# Altium PCB AGRSHUB_PCB.PcbDoc (part 2 of 2)
Units mil, origin at the board's own origin, x right, y up, seen from the top; angles counter-clockwise.
Board outline 4405 x 3410 mil, 2 copper layers (Top Layer, Bottom Layer); 159 components, 148 nets, 602 pads, 103 vias.
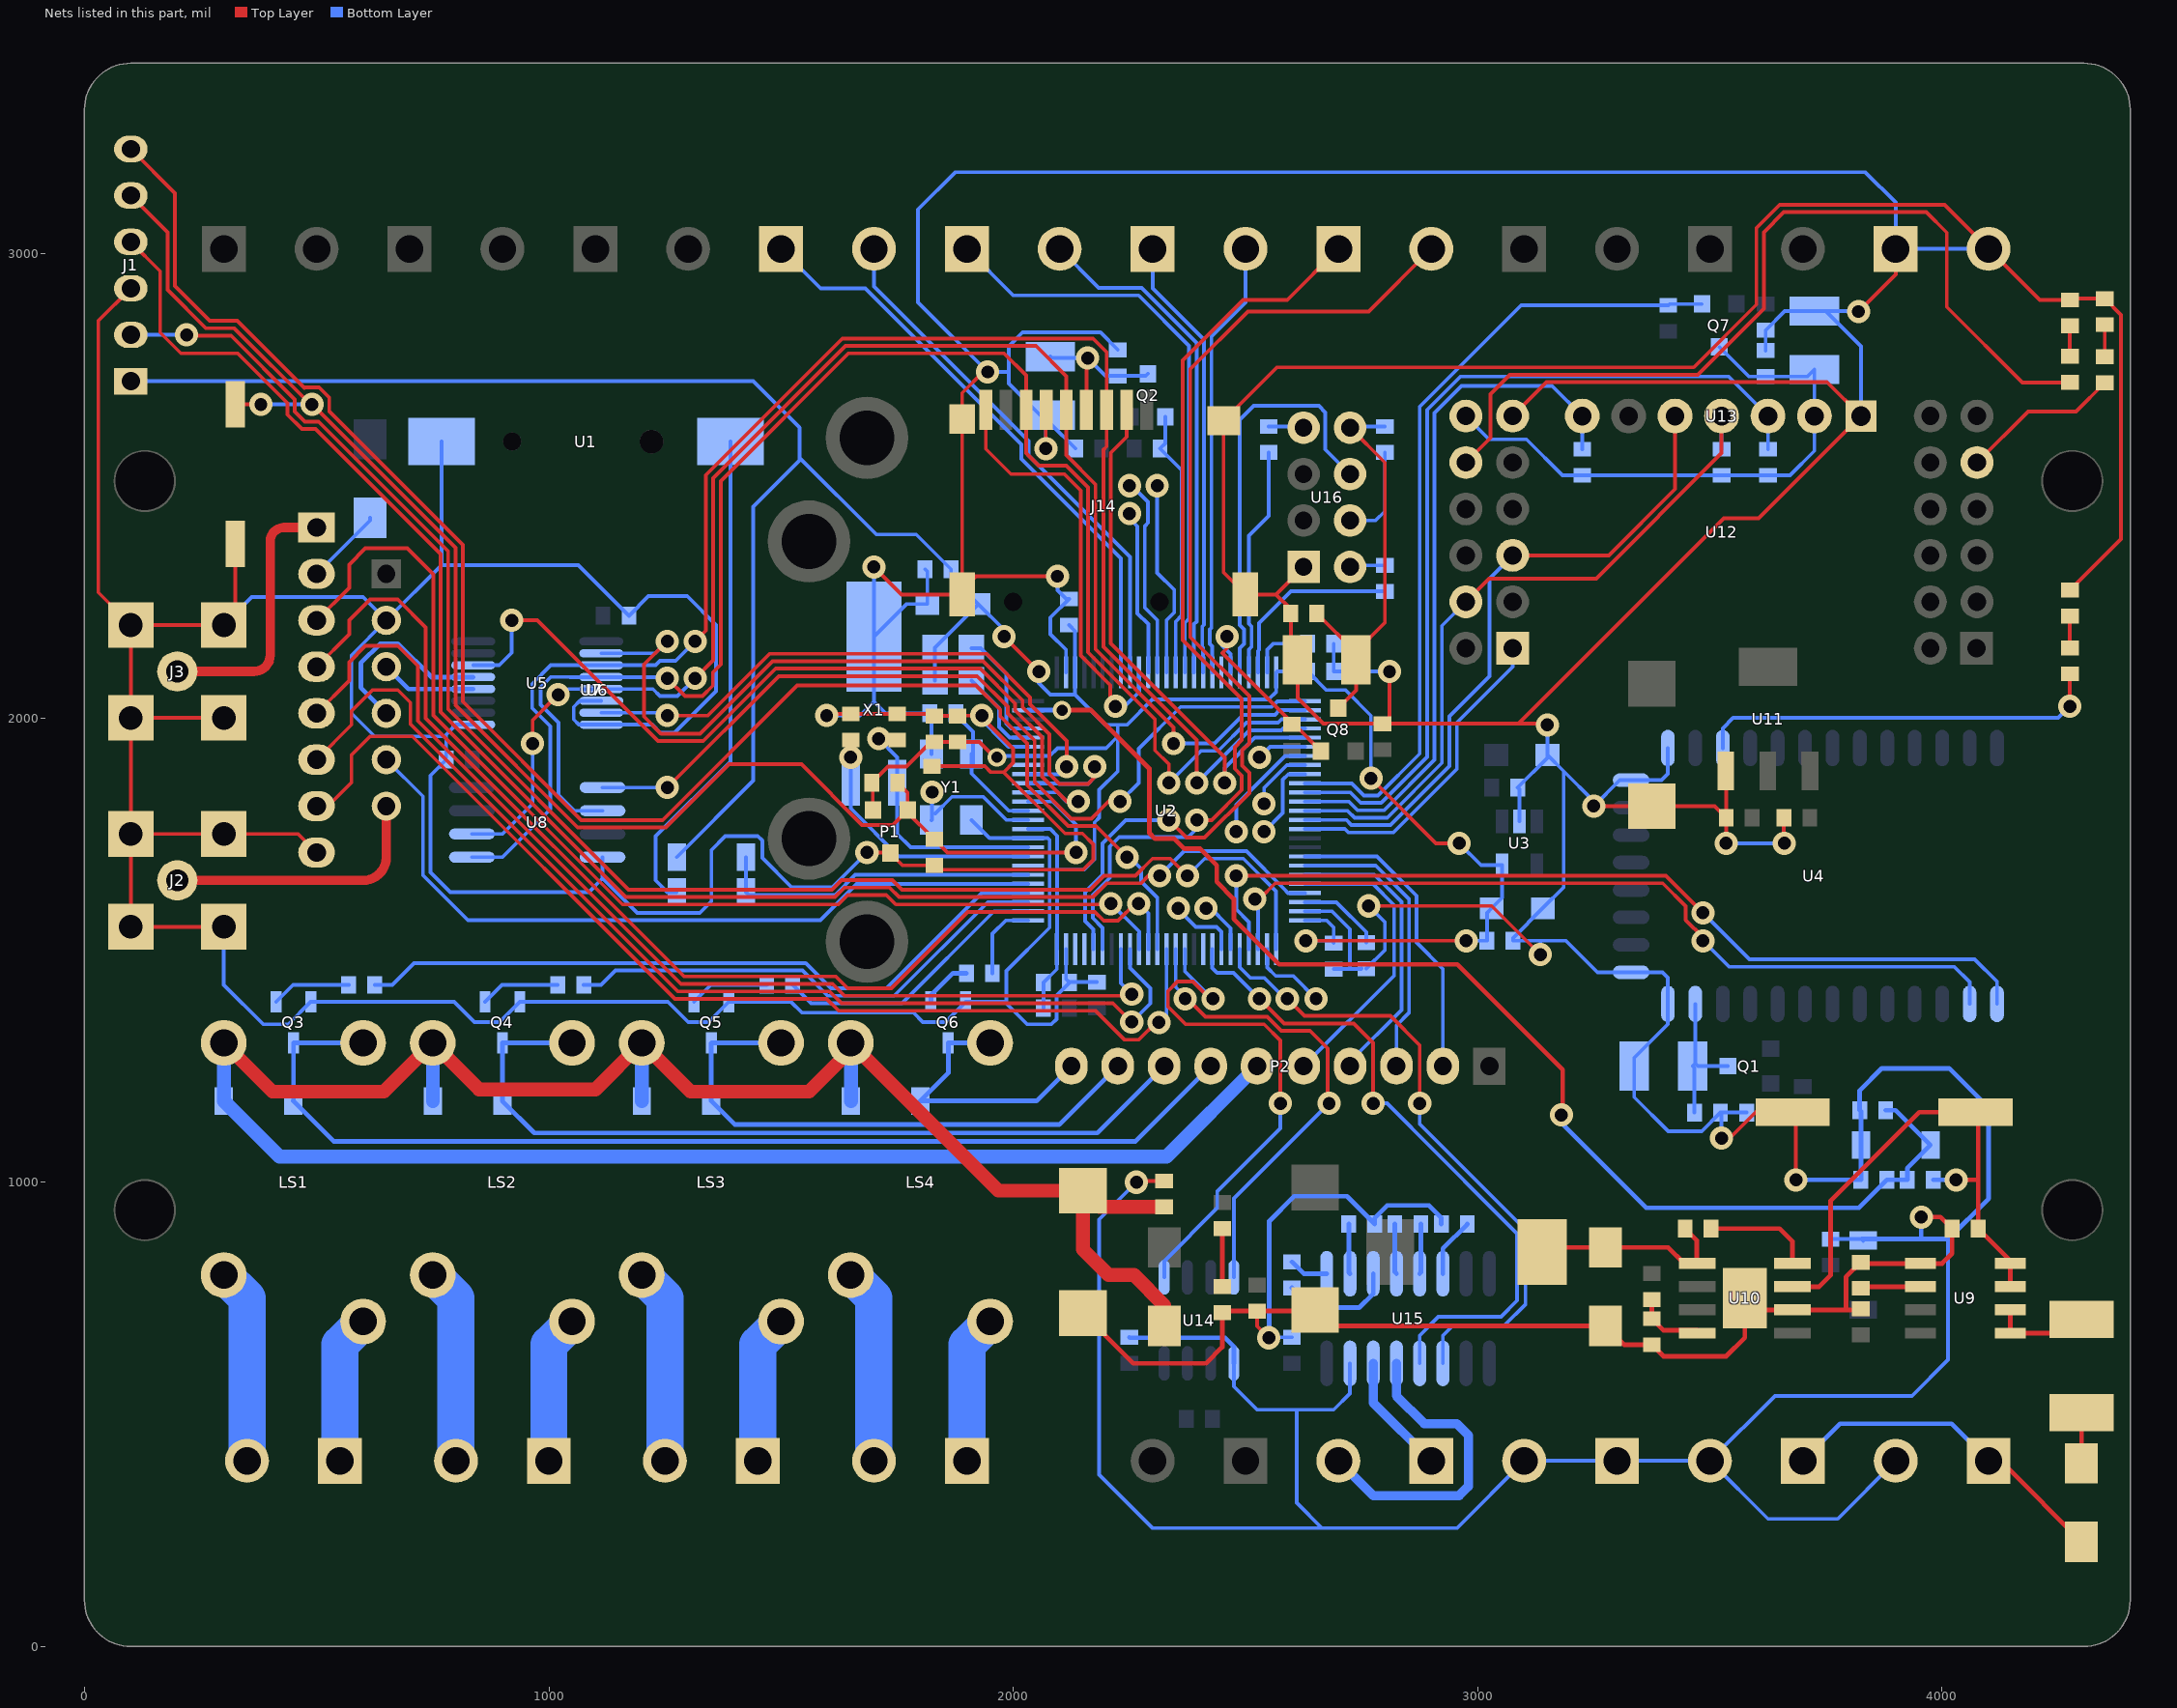
[diagram p2: the nets of this part, all layers, seen from the top]

## Via types
v1: diameter 50, hole 28, Top Layer to Bottom Layer, 101 vias
v2: diameter 40, hole 24, Top Layer to Bottom Layer, 2 vias

## Nets (pads, with @x,y where several pads share a name; then routed paths per layer and width w, separated by ;. In a path a pad name is that pad's centre, name@x,y a point inside that pad or via, vN(x,y) a via of type N, cw(c..) or ccw(c..) an arc to the next point about the centre after c; other vN are vias at no path point) (continued)
GND: C1.1 C2.1 C3.1 C4.1 C5.1 C6.1 C7.1 C8.1 C9.2 C10.2 C11.2 C12.2 C13.1 C14.1 C15.2 C16.2 C17.2 C18.1 C19.1 C20.1 C21.1 C22.1 C23.1 C24.1 C25.1 C26.1 C27.1 C28.1 C29.1 C30.1 C31.1 C32.2 C33.2 C35.1 C36.2 C37.2 C38.1 C39.2 C40.1 C41.1 C42.1 C43.1 C44.1 C45.1 C46.1 C47.2 C49.2 C51.1 C52.1 C53.1 D4.1 D5.1 D8.1 J1.3 J2.2 J2.3 J2.4 J2.5 J3.2 J3.3 J3.4 J3.5 J13.1 J13.2 J14.6 J14.10 J14.11 J14.12 J14.13 J15.2 J16.2 J23.1 J23.2 LED1.2 LED2.2 LED3.2 LED4.2 P1.3 Q3.2 Q4.2 Q5.2 Q6.2 R3.2 R8.1 R11.1 SW1.1 U1.2 U2.10 U2.20 U2.27 U2.74 U2.99 U3.2 U4.13 U4.14 U4.21 U4.22 U5.6 U5.8 U5.9 U6.2 U7.8 U8.4 U9.5 U10.6 U10.9 U11.1 U12.23 U13.1 U14.5 U15.15 U16.1 X1.3 Y1.2 Y1.4 | length 36990.1
  Top Layer w8: J1.3@100,2925 30,2855 30,2270 J3.5@100,2200 ; J2.3@300,1550 J2.2@100,1550 J2.5@100,1750 ; J3.3@300,2000 J3.2@100,2000 ; SW1.1@325,2375 325,2225 J3.4@300,2200 J3.5@100,2200 ; U7.8@500,1710 460,1750 J2.4@300,1750 J2.5@100,1750 ; v1(1598.12,2005) 1601.56,2008.44 C10.2@1650,2008.44 C12.2@1750,2008.44 1825.68,2008.44 C1.1@1830,2004.12 C6.1@1880,2004.12 1880.88,2005 v1(1932.32,2005) 1932.32,2001.32 2000,1933.65 2000,1903.58 1979.42,1883 ; v1(1685,1710) 1733.74,1710 P1.3@1735,1708.74 1761.3,1682.44 C8.1@1830,1682.44 1839.44,1673 2150.33,1673 2172,1694.67 2172,1728 2149,1751 2111.42,1751 1979.42,1883 ; v1(1700,2325) 1759.25,2265.75 J14.11@1880,2265.75 ; C13.1@1825,1896 1938.75,1896 1951.75,1883 1979.42,1883 ; J14.11@1889.77,2265.75 J14.11@1880,2265.75 ; v1(1945,2745) 1935,2745 1889.77,2699.77 J14.10@1889.77,2643.7 J14.11@1889.77,2275.52 ; v1(2070,2580) 2070,2662.52 J14.6@2070.87,2663.38 ; v1(2095,2305) 1919.25,2305 J14.11@1889.77,2275.52 ; v1(2265,1000) 2267.56,1002.56 C38.1@2325,1002.56 ; C35.1@2525,722.44 2525,690 v1(2550,665) ; U16.1@2625,2325 2565.75,2265.75 ; v1(2765,1595) 3030,1595 v1(3135,1490) ; v1(2810,2100) 2810,2002.56 C51.1@2795,1987.56 ; U12.23@3075,2650 3148,2723 3752,2723 U13.1@3825,2650 3605,2430 3530,2430 3087.56,1987.56 ; v1(3150,1985) 3147.44,1987.56 3087.56,1987.56 ; v1(3250,1810) C39.2@3375,1810 3510,1810 C40.1@3535,1785 ; v1(3525,1095) 3543.01,1095 3599.01,1150.99 C36.2@3678.14,1150.99 3685,1144.14 v1(3685,1005) ; U11.1@3534.45,1885.59 3535,1885.04 C40.1@3535,1785 ; v1(3535,1730) C40.1@3535,1785 ; C41.1@3659,1785 3659,1731 v1(3660,1730) ; v1(3820,2875) 3900,2955 J13.1@3900,3010 ; LED1.2@4275,2275 4385,2385 4385,2868 LED3.2@4350,2903 4278,2903 LED4.2@4275,2900 4210,2900 J13.2@4100,3010 4005,3105 3650,3105 3600,3055 3600,2890 3465,2755 2567.98,2755 J14.13@2452.75,2639.77 2452.75,2312.98 J14.12@2499.98,2265.75 2565.75,2265.75 ; J2.5@100,1750 J3.2@100,2000 ; J3.2@100,2000 J3.5@100,2200 ; J14.11@1880,2265.75 J14.11@1889.77,2275.52 ; 2565.75,2265.75 2597.44,2234.06 C53.1@2597.44,2225 2597.44,2139.57 C52.1@2612.01,2125 2612.01,2042.99 2667.44,1987.56 C51.1@2795,1987.56 ; C51.1@2795,1987.56 3087.56,1987.56
  Top Layer w10: C37.2@2150,718.23 2258.23,610 2415,610 2450,645 LED2.2@2450,719 2453.44,722.44 C35.1@2525,722.44 2647.44,722.44 C32.2@2650,725 2684.57,690.43 D8.1@3275,690.43 3315.43,650 R11.1@3375,650 3400,625 3535,625 3575,665 U10.9@3575,725 ; U10.9@3575,750 U10.9@3575,725 ; 3793,725 3793,795.77 3824.79,827.56 C28.1@3825,827.56 3827.56,825 U9.5@3953.54,825 4000,825 4021.56,846.56 C33.2@4021.56,900 3996.56,925 v1(3955,925) ; C30.1@3825,727.56 3822.44,725 U10.6@3677.36,725 U10.9@3575,725
  Bottom Layer w8: J2.3@300,1550 300,1425 385,1340 438.82,1340 Q3.2@487.4,1388.58 796.42,1388.58 840,1345 893.82,1345 Q4.2@937.4,1388.58 1256.42,1388.58 1300,1345 1343.82,1345 Q5.2@1387.4,1388.58 1521.42,1388.58 1545,1365 1785,1365 1805,1345 1853.82,1345 Q6.2@1897.4,1388.58 1981.42,1388.58 2030,1340 2081.97,1340 2093,1351.03 2093,1402 C2.1@2121,1430 ; J3.4@300,2200 360,2260 600,2260 U6.2@650,2210 ; U1.2@768.98,2595 768.98,2328.98 ; U5.9@837.2,1985.43 800.43,1985.43 779,1964 ; U5.6@1112.8,2036.61 1066.61,2036.61 1053.55,2023.55 1053.55,1996.45 1064.57,1985.43 U5.8@1112.8,1985.43 1222.24,1985.43 1239.67,1968 1270.33,1968 1360,2057.67 1360,2200 1298,2262 1214.56,2262 C23.1@1172.56,2220 1063.58,2328.98 768.98,2328.98 ; U8.4@1115.75,1700 1115.75,1654.25 ; v1(1598.12,2005) 1670,2005 1700,2035 ; v1(1685,1710) 1610,1635 1522.76,1635 1459.42,1698.34 1459.42,1735.58 1450,1745 1380,1745 1350,1715 1350,1605 1325,1580 1190,1580 1115.75,1654.25 ; v1(1700,2325) X1.3@1700,2174.96 ; C7.1@1810,2320 1814.93,2315.07 C17.2@1814.93,2245 1770.04,2245 X1.3@1700,2174.96 ; Y1.2@1824,1922 1824,2006 C14.1@1820,2010 1725,2010 1700,2035 ; Y1.4@1910,1780 1949.06,1740.94 U2.10@2031.77,1740.94 2074.06,1740.94 2078.22,1736.78 2078.22,1548.22 1985,1455 1985,1385 ; v1(1932.32,2005) 1922.42,2005 1989.63,1937.8 U2.20@2031.77,1937.8 ; v1(2070,2580) 2070,2642.01 C25.1@2080,2652.01 2057.99,2652.01 1990,2720 1990,2745 ; C25.1@2080,2634 C24.1@2134,2580 ; v1(2095,2305) 2095,2275 2114,2256 C5.1@2120,2256 2080,2216 2080,2180 2113.46,2146.54 U2.27@2113.46,2098.23 ; U2.99@2113.46,1501.77 2113.46,1437.54 C2.1@2121,1430 ; R3.2@2180,1431 2122,1431 C2.1@2121,1430 ; C26.1@2225,2792.56 2187.56,2830 2020,2830 1990,2800 1990,2745 ; v1(2265,1000) 2185,920 2185,370 2300,255 2665,255 ; U14.5@2475,610 2475,560 2525,510 2690,510 2725,545 U15.15@2725,610 ; v1@2551,666 C46.1@2600,666 ; 2610,510 2610,310 2665,255 ; U2.74@2628.23,1583.46 2686.54,1583.46 2725,1545 2725,1459 ; C3.1@2690,1459 2725,1459 ; C9.2@2690,2160 C4.1@2690,2100 v1(2810,2100) ; C11.2@2750,1460 2749,1459 2725,1459 ; C11.2@2760,1460 2800,1500 2800,1560 v1(2765,1595) ; U3.2@3090,1777.24 3090,1846 C18.1@3086,1850 3150.13,1914.13 C15.2@3150.13,1920 ; v1(3135,1490) 3135,1520 ; v1(3150,1985) 3150.13,1984.87 C15.2@3150.13,1920 ; U4.22@3409.5,1935 3409.5,1879.5 3395.83,1865.83 U4.21@3330.37,1865.83 3305.83,1865.83 v1(3250,1810) 3250,1820.13 3185,1885.13 ; v1(3525,1095) C22.1@3525,1147.56 ; v1(3535,1730) v1(3660,1730) ; C20.1@3579,1150 3525,1150 C22.1@3525,1147.56 ; C44.1@3620,2791 C42.1@3620,2835 3660.98,2875.98 C43.1@3725,2875.98 C43.1@3749.02,2875.98 ; C29.1@3760,877.56 D4.1@3827.17,877.56 ; v1(3820,2875) 3819.02,2875.98 C43.1@3749.02,2875.98 ; U13.1@3825,2650 3825,2800 C43.1@3749.02,2875.98 ; J15.2@3900,400 3775,275 3625,275 J16.2@3500,400 ; 4012.56,877.56 4012.56,617.56 3935,540 3640,540 J16.2@3500,400 ; J13.2@4100,3010 J13.1@3900,3010 3900,3110 3835,3175 1875,3175 1795,3095 1795,2895 v1(1945,2745) 1990,2745 ; U6.2@650,2210 575,2135 575,2010 625,1960 775,1960 779,1964 ; U6.2@650,2210 768.98,2328.98 ; 779,1964 C27.1@779,1910 745,1876 745,1667.42 787.42,1625 1086.5,1625 1115.75,1654.25 ; 1700,2035 X1.3@1700,2174.96 ; 2665,255 2955,255 J23.2@3100,400 J23.1@3300,400 J16.2@3500,400 ; 3135,1520 C19.1@3076,1520 3076,1525.87 C16.2@3140.13,1590 3185,1634.87 3185,1885.13 ; 3135,1520 3190,1520 3257.87,1452.13 U4.14@3330.37,1452.13 3397.87,1452.13 3409.5,1440.5 U4.13@3409.5,1383.85 3409.5,1340 3337.01,1267.51 C21.1@3337.01,1250 3337.01,1182.99 3410,1110 3482.56,1110 C22.1@3522.56,1150 C22.1@3525,1147.56 ; C15.2@3150.13,1920 3185,1885.13
  Bottom Layer w10: C45.1@2250,666 2251,665 2456.01,665 2475,646.01 U14.5@2475,610 ; v1@2551,666 2551,916 2605,970 2718.44,970 C47.2@2778.44,910 2778.44,923.44 2805,950 2895,950 2921.56,923.44 C49.2@2921.56,910 ; v1(3685,1005) R8.1@3825,1005 3825,1079.73 D5.1@3825.27,1080 3825.27,1152.17 C31.1@3822.44,1155 3822.44,1197.44 3870,1245 4015,1245 4100,1160 4100,965 4012.56,877.56 3955,877.56 ; D4.1@3830,874.73 3827.17,877.56 3955,877.56 ; v1(3955,925) 3955,877.56
GPS_EN: U2.5 U6.5 | length 1657.3
  Bottom Layer w8: U6.5@650,1910 729,1831 729,1660.8 825.8,1564 1584.25,1564 1662.77,1642.52 U2.5@2031.77,1642.52
GPS_RX: U5.12 U6.3 | length 207
  Bottom Layer w10: U6.3@650,2110 697.8,2062.2 U5.12@837.2,2062.2
GPS_TX: U5.13 U6.4 | length 420.2
  Bottom Layer w10: U6.4@650,2010 595,2065 595,2117.93 637.07,2160 675,2160 747.2,2087.8 U5.13@837.2,2087.8
GSM_DTR: U2.90 U7.4 | length 2507.5
  Top Layer w8: U7.4@500,2110 570,2180 570,2210 615,2255 675,2255 735,2195 735,1999.03 1291.03,1443 1617.75,1443 1643.34,1417.42 1737.42,1417.42 1902,1582 2175.67,1582 2194.67,1563 2225.33,1563 2262.33,1600 v1(2270,1600)
  Bottom Layer w8: v1(2270,1600) 2290.63,1579.37 U2.90@2290.63,1501.77
GSM_KEY: U2.91 U7.3 | length 2440.8
  Top Layer w8: U7.3@500,2210 570,2280 570,2330 605,2365 695,2365 751,2309 751,2005.66 1158.66,1598 1622.75,1598 1643.34,1618.58 1726.66,1618.58 1747.25,1598 2208,1598 v1(2210,1600)
  Bottom Layer w8: v1(2210,1600) 2210.94,1600 2270.94,1540 U2.91@2270.94,1501.77
GSM_RST: U2.88 U7.7 | length 2361.3
  Top Layer w8: U7.7@500,1810 523.93,1810 575,1861.07 575,1920 615,1960 706.15,1960 1271.15,1395 1597.87,1395 1623.46,1369.42 2176.84,1369.42 2239.26,1307 2270.74,1307 2308.74,1345 2309.67,1344.07 v1(2313.45,1344.07)
  Bottom Layer w8: v1(2313.45,1344.07) 2330,1360.63 U2.88@2330,1501.77
I00: J7.1 U2.33 | length 1271.2
  Bottom Layer w8: J7.1@1500,3010 1585,2925 1681.32,2925 2017,2589.32 2017,2558.05 2231.57,2343.47 U2.33@2231.57,2098.23
I01: J7.2 U2.34 | length 1140.1
  Bottom Layer w8: J7.2@1700,3010 1700,2928.95 2033,2595.95 2033,2564.67 2251.26,2346.41 U2.34@2251.26,2098.23
I02: J8.1 U2.40 | length 1271.9
  Bottom Layer w8: J8.1@1900,3010 2000,2910 2269.75,2910 2378.63,2801.11 2378.63,2213.84 2369.37,2204.58 U2.40@2369.37,2098.23
I2C1_SCL: J10.1 U2.95 | length 2042
  Top Layer w8: v1(2395,1780) 2427.33,1780 2492,1844.67 2492,1875.33 2477,1890.33 2477,1936.95 2492,1951.95 2492,2040.37 2365,2167.37 2365,2770 2495,2900 2590,2900 J10.1@2700,3010
  Bottom Layer w8: U2.95@2192.2,1501.77 2192,1501.98 2192,1548 2171,1569 2171,1618.37 2208,1655.37 2208,1723 2228,1743 2376.74,1743 2413.74,1780 v1(2395,1780)
I2C1_SDA: J10.2 U2.96 | length 2247.1
  Top Layer w8: v1(2335,1780) 2373,1742 2411.95,1742 2508,1838.05 2508,1881.95 2493,1896.95 2493,1930.33 2508,1945.33 2508,2047 2381,2174 2381,2751 2505,2875 2765,2875 J10.2@2900,3010
  Bottom Layer w8: U2.96@2172.52,1501.77 2172.52,1544.85 2155,1562.37 2155,1625 2192,1662 2192,1729.63 2242.37,1780 v1(2335,1780)
I03: J8.2 U2.41 | length 1090.2
  Bottom Layer w8: J8.2@2100,3010 2184,2926 2276.37,2926 2394.63,2807.74 2394.63,2207.21 2389.06,2201.64 U2.41@2389.06,2098.23
I04: J9.1 U2.42 | length 959.8
  Bottom Layer w8: J9.1@2300,3010 2300,2925 2410.63,2814.37 2410.63,2200.59 2407,2196.95 2407,2153.05 2408.74,2151.31 U2.42@2408.74,2098.23
I05: J9.2 U2.43 | length 945.9
  Bottom Layer w8: U2.43@2428.43,2098.23 2428.43,2154.25 2423,2159.67 2423,2190.33 2426.63,2193.96 2426.63,2820.99 2500,2894.36 J9.2@2500,3010
LED0: P2.2 U2.68 | length 665.3
  Bottom Layer w8: U2.68@2628.23,1701.57 2783.17,1701.57 2868,1616.75 2868,1516.33 2925,1459.33 P2.2@2925,1250
LED1: P2.3 U2.69 | length 624.8
  Bottom Layer w8: U2.69@2628.23,1681.89 2780.23,1681.89 2852,1610.12 2852,1364.37 2825,1337.37 P2.3@2825,1250
LED2: P2.4 U2.70 | length 631.6
  Bottom Layer w8: U2.70@2628.23,1662.2 2777.29,1662.2 2836,1603.49 2836,1371 2725,1260 P2.4@2725,1250
LED3: P2.5 U2.71 | length 638.3
  Bottom Layer w8: P2.5@2625,1250 2820,1445 2820,1596.86 2774.34,1642.52 U2.71@2628.23,1642.52
NetB1_2: B1.2 U2.22 | length 256.2
  Bottom Layer w8: B1.2@1910,2150 1930,2150 1985.32,2094.68 1985.32,1987.35 1995.51,1977.17 U2.22@2031.77,1977.17
NetB2_2: B2.2 U2.21 | length 195.9
  Bottom Layer w8: B2.2@1910,2080 1969.32,2020.68 1969.32,1980.72 1992.57,1957.48 U2.21@2031.77,1957.48
NetC9_1: C9.1 U2.49 | length 141.3
  Bottom Layer w8: U2.49@2546.54,2098.23 2546.54,2146.54 2560,2160 C9.1@2634,2160
NetC10_1: C10.1 U2.8 X1.1 | length 534.6
  Bottom Layer w8: v1(1650,1915) X1.1@1650,1860 1650,1805 1753.43,1701.57 U2.8@2031.77,1701.57
NetC11_1: C11.1 U2.73 | length 181.2
  Bottom Layer w8: U2.73@2628.23,1603.15 2695.59,1603.15 2760,1538.74 C11.1@2760,1516
NetC12_1: C12.1 U2.9 X1.2 | length 524.8
  Top Layer w8: C12.1@1745,1945 1745,1947.44 C12.1@1750,1952.44
  Bottom Layer w8: v1(1710,1955) 1750,1915 X1.2@1750,1860 1750,1750 1778.74,1721.26 U2.9@2031.77,1721.26
NetC13_2: C13.2 U2.12 Y1.1 | length 295.3
  Bottom Layer w8: Y1.1@1824,1780 1825,1781 v1(1825,1840) ; Y1.1@1832.28,1794.28 1868,1830 1935,1830 1984.68,1780.32 U2.12@2031.77,1780.32
NetC14_2: C14.2 U2.13 Y1.3 | length 327.6
  Bottom Layer w8: C14.2@1876,2010 1876,2006.67 1913,1969.67 Y1.3@1913,1894.63 ; Y1.3@1910,1922 1910,1880 1990,1800 U2.13@2031.77,1800
NetC21_2: C21.2 C22.2 Q1.3 U4.12 | length 310.1
  Bottom Layer w8: C22.2@3466.56,1150 3466.56,1246.43 C21.2@3462.99,1250 C21.2@3468.55,1255.56 ; U4.12@3468.55,1383.85 C21.2@3468.55,1255.56 ; Q1.3@3538.74,1250 3474.11,1250 C21.2@3468.55,1255.56
NetC25_2: C25.2 C26.2 J14.4 Q2.3 | length 341.8
  Top Layer w8: J14.4@2157.48,2663.38 2157.48,2772.48 v1(2160,2775)
  Bottom Layer w8: C25.2@2080,2777.99 2082.99,2775 v1(2160,2775) 2198.44,2736.56 C26.2@2225,2736.56 2285.3,2736.56 Q2.3@2290,2741.26
NetC28_2: C28.2 U9.6 | length 130
  Top Layer w10: C28.2@3825,771.56 3828.44,775 U9.6@3953.54,775
NetC34_1: C34.1 U10.8 | length 233.8
  Top Layer w10: C34.1@3502.56,900 3650,900 3677.36,872.64 U10.8@3677.36,825
NetC34_2: C34.2 D8.2 L1.1 U10.1 | length 438.3
  Top Layer w10: L1.1@3138.39,850 3147.95,859.57 D8.2@3275,859.57 3410,859.57 3444.57,825 U10.1@3472.64,825 3471.56,826.08 3471.56,875 C34.2@3446.56,900
NetC43_2: C43.2 C44.2 Q7.3 R18.1 R20.1 R21.1 U12.24 U13.2 | length 1237.6
  Bottom Layer w8: U12.24@2974.61,2650 3024.61,2600 3105,2600 3182.56,2522.44 R21.1@3225,2522.44 R20.1@3525,2522.44 R18.1@3625,2522.44 3672.44,2522.44 3725,2575 U13.2@3725,2650 C43.2@3725,2750 3710,2735 C44.2@3620,2735 3583.74,2735 Q7.3@3520,2798.74
NetC47_1: C47.1 U15.2 | length 108.1
  Bottom Layer w10: C47.1@2722.44,910 2722.44,805.47 U15.2@2725,802.91
NetC48_1: C48.1 U15.3 | length 247.9
  Bottom Layer w10: C48.1@2600,772.44 2642.44,730 2745,730 2775,760 U15.3@2775,802.91
NetC48_2: C48.2 U15.1 | length 85.6
  Bottom Layer w10: C48.2@2600,828.44 2600.21,828.44 2625.74,802.91 U15.1@2675,802.91
NetC49_1: C49.1 U15.6 | length 128.9
  Bottom Layer w10: U15.6@2925,802.91 2925,857.23 2977.56,909.79 C49.1@2977.56,910
NetC50_1: C50.1 U15.5 | length 108.1
  Bottom Layer w10: U15.5@2875,802.91 2877.56,805.47 C50.1@2877.56,910
NetC50_2: C50.2 U15.4 | length 108.5
  Bottom Layer w10: C50.2@2821.56,910 2821.56,806.35 U15.4@2825,802.91
NetC52_2: C52.2 C53.2 Q8.3 R24.1 U16.8 | length 871.9
  Top Layer w8: C53.2@2653.44,2225 C52.2@2737.99,2140.45 ; Q8.3@2700,2021.26 2737.99,2059.25 C52.2@2737.99,2125 C52.2@2737.99,2140.45 ; U16.8@2725,2625 2800,2550 2800,2205 2737.99,2142.99 C52.2@2737.99,2140.45
  Bottom Layer w8: U16.8@2725,2625 2727.56,2627.56 R24.1@2800,2627.56
NetD1_2: D1.2 D2.2 U2.6 | length 702.4
  Bottom Layer w8: D1.2@1424.73,1700 D2.2@1424.73,1625 1430.73,1619 1616.63,1619 1659.83,1662.2 U2.6@2031.77,1662.2
NetD2_1: D2.1 U1.1 | length 1067.3
  Bottom Layer w8: D2.1@1275.27,1625 1255,1625 1230,1650 1230,1745 1391.02,1906.02 U1.1@1391.02,2595
NetD3_2: D3.2 U7.2 | length 168.5
  Bottom Layer w8: U7.2@500,2310 615,2425 D3.2@615,2430.87
NetD6_2: D6.2 PPTC1.1 | length 109.1
  Top Layer w10: D6.2@4300,394.57 PPTC1.1@4300,503.7
NetD9_1: D9.1 LS1.2 P2.7 Q3.3 | length 2353.5
  Bottom Layer w10: LS1.2@600,1300 Q3.3@450,1300 450,1175.27 D9.1@449.73,1175 536.73,1088 2263,1088 P2.7@2425,1250
NetD10_1: D10.1 LS2.2 P2.8 Q4.3 | length 1788.6
  Bottom Layer w10: LS2.2@1050,1300 Q4.3@900,1300 900,1175.27 D10.1@899.73,1175 968.73,1106 2181,1106 P2.8@2325,1250
NetD11_1: D11.1 LS3.2 P2.9 Q5.3 | length 1223.7
  Bottom Layer w10: LS3.2@1500,1300 Q5.3@1350,1300 1349.73,1299.73 D11.1@1349.73,1175 1400.73,1124 2099,1124 P2.9@2225,1250
NetD12_1: D12.1 LS4.2 P2.10 Q6.3 | length 596.3
  Bottom Layer w10: LS4.2@1950,1300 Q6.3@1860,1300 1860,1235.27 D12.1@1799.73,1175 2050,1175 P2.10@2125,1250
NetJ2_1: J2.1 U6.6 | length 588.5
  Top Layer w20: J2.1@200,1650 600,1650 ccw(c600,1700) 650,1700 U6.6@650,1810
NetJ3_1: J3.1 U7.1 | length 582.1
  Top Layer w20: J3.1@200,2100 365,2100 ccw(c365,2135) 400,2135 400,2380 cw(c430,2380) 430,2410 U7.1@500,2410
NetJ17_1: J17.1 LS1.4 | length 320.7
  Bottom Layer w80: J17.1@550,400 550,650 LS1.4@600,700
NetJ17_2: J17.2 LS1.3 | length 420.7
  Bottom Layer w80: LS1.3@300,800 350,750 J17.2@350,400
NetJ18_1: J18.1 LS2.4 | length 320.7
  Bottom Layer w80: J18.1@1000,400 1000,650 LS2.4@1050,700
NetJ18_2: J18.2 LS2.3 | length 420.7
  Bottom Layer w80: LS2.3@750,800 800,750 J18.2@800,400
NetJ19_1: J19.1 LS3.4 | length 320.7
  Bottom Layer w80: J19.1@1450,400 1450,650 LS3.4@1500,700
NetJ19_2: J19.2 LS3.3 | length 420.7
  Bottom Layer w80: LS3.3@1200,800 1250,750 J19.2@1250,400
NetJ20_1: J20.1 LS4.4 | length 320.7
  Bottom Layer w80: J20.1@1900,400 1900,650 LS4.4@1950,700
NetJ20_2: J20.2 LS4.3 | length 420.7
  Bottom Layer w80: LS4.3@1650,800 1700,750 J20.2@1700,400
NetLED1_1: LED1.1 R4.2 | length 68.1
  Top Layer w8: R4.2@4275,2150.88 LED1.1@4275,2219
NetLED2_1: LED2.1 R10.1 | length 125
  Top Layer w10: LED2.1@2450,775 R10.1@2450,900
NetLED3_1: LED3.1 R16.1 | length 69.4
  Top Layer w8: R16.1@4350,2777.56 LED3.1@4350,2847
NetLED4_1: LED4.1 R17.2 | length 65.6
  Top Layer w8: R17.2@4275,2778.44 LED4.1@4275,2844
NetPPTC1_2: PPTC1.2 U9.1 U9.2 | length 215.7
  Top Layer w10: U9.2@4146.46,725 U9.1@4146.46,675 4270.7,675 PPTC1.2@4300,704.3
NetQ3_1: Q3.1 R12.2 | length 171.5
  Bottom Layer w8: Q3.1@412.6,1388.58 449.02,1425 R12.2@569,1425
NetQ4_1: Q4.1 R13.2 | length 171.5
  Bottom Layer w8: Q4.1@862.6,1388.58 899.02,1425 R13.2@1019,1425
NetQ5_1: Q5.1 R14.2 | length 171.5
  Bottom Layer w8: Q5.1@1312.6,1388.58 1349.02,1425 R14.2@1469,1425
NetQ6_1: Q6.1 R15.2 | length 110.1
  Bottom Layer w10: Q6.1@1822.6,1388.58 1822.6,1402.6 1870,1450 R15.2@1899,1450
NetR4_1: R4.1 U4.24 | length 879.5
  Top Layer w8: v1(4275,2025) R4.1@4275,2094.88
  Bottom Layer w8: U4.24@3527.6,1935 3527.6,1977.6 3550,2000 4250,2000 v1(4275,2025)
NetR9_1: R9.1 R11.2 U10.4 | length 155.4
  Top Layer w10: R9.1@3375,747.44 R11.2@3375,706 3400,681 3472.64,681 U10.4@3472.64,675
NetR16_2: R16.2 U12.9 | length 346.1
  Top Layer w8: U12.9@4075,2550 4185,2660 4288.44,2660 R16.2@4350,2721.56
NetR17_1: R17.1 U12.22 | length 1921.2
  Top Layer w8: U12.22@2974.61,2550 3027.57,2602.96 3027.57,2697.43 3069.13,2739 3474,2739 3616,2881 3616,3046 3659,3089 3966,3089 4010,3045 4010,2885 4172.56,2722.44 R17.1@4275,2722.44
NetR23_2: R23.2 U16.2 | length 76.4
  Bottom Layer w8: U16.2@2725,2325 2728.44,2328.44 R23.2@2800,2328.44
NetR24_2: R24.2 U16.4 | length 209.8
  Bottom Layer w8: U16.4@2725,2425 2780,2425 2800,2445 R24.2@2800,2571.56
NetR25_1: R25.1 U16.7 | length 76.1
  Bottom Layer w8: R25.1@2550,2627.56 2622.44,2627.56 U16.7@2625,2625
NRST: C8.2 J1.5 P1.1 R1.1 SW1.2 U2.14 | length 3453.9
  Top Layer w8: J1.5@100,3125 179,3046 179,2921.96 261.96,2839 322.67,2839 486.67,2675 v1(490,2675) 799,2366 799,2026.96 1061.96,1764 1251.63,1764 1387.63,1900 1543.66,1900 1674.1,1769.56 1740.7,1769.56 P1.1@1771.14,1800 ; SW1.2@325,2675 v1(380,2675) ; R1.1@1751,1860 1772.4,1838.6 P1.1@1772.4,1801.26 P1.1@1771.14,1800 ; v1(2135,1710) 1858.44,1710 C8.2@1830,1738.44 1769.79,1798.65 1768.44,1800 P1.1@1771.14,1800
  Bottom Layer w8: v1(380,2675) v1(490,2675) ; U2.14@2031.77,1819.69 2085.31,1819.69 2135,1770 v1(2135,1710)
PA15: U2.77 | length 172.6
  Bottom Layer w8: U2.77@2546.54,1501.77 2546.54,1462.51 2565,1444.04 2602.88,1444.04 v1(2651.92,1395)
PB1: U2.36 | length 372.7
  Bottom Layer w8: v1(2250,2440) 2240,2440 2267.26,2412.74 2267.26,2225.11 2290.63,2201.74 U2.36@2290.63,2098.23
PB2: U2.37 | length 442.3
  Bottom Layer w8: v1(2250,2500) 2250,2505 2290,2465 2290,2420 2283.27,2413.27 2283.27,2236.88 2310.32,2209.83 U2.37@2310.32,2098.23
PC3: U2.18
PC13: U2.7
PD0: U2.81 | length 132.2
  Bottom Layer w8: v1(2415,1590) 2410,1590 2417.5,1597.5 2467.8,1547.2 U2.81@2467.8,1501.77
PD1: U2.82 | length 156.3
  Bottom Layer w8: v1(2355,1590) 2352.67,1590 2392.67,1550 2437.37,1550 2448.11,1539.26 U2.82@2448.11,1501.77
PD3: U2.84
PD9: U2.56 | length 107.7
  Bottom Layer w8: v1(2530,1915) 2552.8,1937.8 U2.56@2628.23,1937.8
PD10: U2.57 | length 249.6
  Bottom Layer w8: v1(2480,1755) 2480,1812.67 2585.44,1918.11 U2.57@2628.23,1918.11
PD11: U2.58 | length 142.9
  Bottom Layer w8: v1(2540,1815) 2540,1849.4 2589.02,1898.43 U2.58@2628.23,1898.43
PD12: U2.59 | length 181.5
  Bottom Layer w8: v1(2540,1755) 2580,1795 2580,1866.77 2591.97,1878.74 U2.59@2628.23,1878.74
PE0: U2.97
PE1: U2.98
PE7: U2.38 | length 423.8
  Bottom Layer w8: v1(2310,2500) 2310,2312.13 2346.63,2275.5 2346.63,2227.1 2330,2210.46 U2.38@2330,2098.23
PE13: U2.44
REL0: R12.1 U2.4 | length 1533.9
  Bottom Layer w8: R12.1@625,1425 662.56,1425 709.56,1472 1553,1472 1607.58,1417.42 1726.66,1417.42 1931.66,1622.42 2031.35,1622.42 U2.4@2031.77,1622.83
REL1: R13.1 U2.3 | length 1075.8
  Bottom Layer w8: R13.1@1075,1425 1112.56,1425 1143.56,1456 1545.97,1456 1600.55,1401.42 1743.27,1401.42 1945,1603.15 U2.3@2031.77,1603.15
REL2: R14.1 U2.2 | length 605.2
  Bottom Layer w8: R14.1@1525,1425 1564.58,1385.42 1760.42,1385.42 1958.46,1583.46 U2.2@2031.77,1583.46
REL3: R15.1 U2.1 | length 173.7
  Bottom Layer w8: R15.1@1955,1450 1955,1535 1983.78,1563.78 U2.1@2031.77,1563.78
RF/ZIG_EN: Q7.1 R19.2 U2.60 | length 1741.3
  Bottom Layer w8: U2.60@2628.23,1859.06 2728.62,1859.06 2754.67,1833 2785.33,1833 2875,1922.67 2875,2670 3093.44,2888.44 R19.2@3410,2888.44 3412.82,2891.26 Q7.1@3482.6,2891.26
RF_SETA: R18.2 U2.61 U13.3 | length 1930.8
  Bottom Layer w8: U2.61@2628.23,1839.37 2725.68,1839.37 2748.05,1817 2791.95,1817 2891,1916.05 2891,2663.37 2962.63,2735 3540,2735 U13.3@3625,2650 R18.2@3625,2578.44
RF_SETB: R21.2 U2.62 U13.7 | length 1519.4
  Bottom Layer w8: U2.62@2628.23,1819.69 2722.73,1819.69 2741.42,1801 2798.58,1801 2907,1909.42 2907,2656.75 2965.25,2715 3160,2715 U13.7@3225,2650 R21.2@3225,2578.44
RS232_RX: J22.1 U15.14 | length 261.8
  Bottom Layer w20: U15.14@2775,610 2775,525 J22.1@2900,400
RS232_TX: J22.2 U15.13 | length 689.6
  Bottom Layer w20: J22.2@2700,400 2775,325 2960,325 2980,345 2980,455 2955,480 2885,480 2825,540 U15.13@2825,610
SC_CS: U2.16 U5.2 | length 1754.9
  Top Layer w8: v1(1255,2165) 1205,2115 1205,2002.67 1241.67,1966 1325.75,1966 1481.75,2122 1935.53,2122 2020,2037.53 2020,2022.88 2078,1964.88 2078,1879.67 2099.67,1858 2160.98,1858 2175,1872.02 v1(2175,1895)
  Bottom Layer w8: U5.2@1112.8,2138.98 1228.98,2138.98 v1(1255,2165) ; U2.16@2031.77,1859.06 2098.62,1859.06 2099.67,1858 2160.98,1858 2175,1872.02 v1(2175,1895)
SC_IRQ: U2.17 U5.7 | length 1291.5
  Top Layer w8: v1(1255,2005) 1342.12,2005 1475.12,2138 1942.16,2138 2036,2044.16 2036,2029.51 2115,1950.51 v1(2115,1895)
  Bottom Layer w8: U5.7@1112.8,2011.02 1248.98,2011.02 v1(1255,2005) ; U2.17@2031.77,1878.74 2098.74,1878.74 v1(2115,1895)
SC_RESET: U2.15 U5.14 | length 1849.3
  Top Layer w8: v1(920,2210) 975.05,2210 1235.05,1950 1332.37,1950 1488.37,2106 1928.9,2106 2004,2030.9 2004,2016.25 2062,1958.25 2062,1873.05 2115.05,1820 v1(2140,1820)
  Bottom Layer w8: U5.14@837.2,2113.39 893.39,2113.39 920,2140 v1(920,2210) ; U2.15@2031.77,1839.37 2095,1839.37 2114.37,1820 v1(2140,1820)
SD_CS: J14.2 U2.55 | length 1151.5
  Top Layer w8: J14.2@2244.1,2663.38 2244.1,2605 2210,2570.9 2210,2160 2455,1915 v1(2455,1860)
  Bottom Layer w8: v1(2455,1860) 2455,1892.33 2520.15,1957.48 U2.55@2628.23,1957.48
SD_DET: J14.9 U2.35 | length 927.2
  Top Layer w8: J14.9@1940.95,2663.38 1940.95,2579.05 1995,2525 2109.75,2525 2145,2489.75 2145,2134.49 2209,2070.49 2209,2036 v1(2220,2025)
  Bottom Layer w8: v1(2220,2025) 2240,2025 2270.94,2055.94 U2.35@2270.94,2098.23
SD_EN: Q2.1 R6.2 U2.39 | length 579.9
  Bottom Layer w8: Q2.1@2327.4,2648.74 2327.4,2591.4 R6.2@2316,2580 2362.63,2533.37 2362.63,2220.47 2349.69,2207.52 U2.39@2349.69,2098.23
SPI2_SCK: J14.5 U2.52 U5.5 U8.6 | length 3289.4
  Top Layer w8: v1(965,1945) 965,1995 v1(1020,2050) ; v1(1315,2085) 1354,2124 1354,2516.37 1638.63,2801 2049,2801 2114.18,2735.82 J14.5@2114.18,2663.38 2114.18,2565.82 2177,2503 2177,2147.75 2345,1979.75 v1(2345,1945)
  Bottom Layer w8: U8.6@834.25,1750 900,1750 965,1815 v1(965,1945) ; v1(1020,2050) 1030,2050 1042.2,2062.2 U5.5@1112.8,2062.2 1224.06,2062.2 1239.26,2047 1277,2047 v1(1315,2085) ; v1(2345,1945) 2433.33,1945 2494.81,2006.48 2563.15,2006.48 2573.2,2016.54 U2.52@2628.23,2016.54
SPI2_SI: J14.3 U2.54 U5.3 U8.5 | length 3546.7
  Top Layer w8: v1(1315,2165) 1338,2188 1338,2523 1632,2817 2171.74,2817 2200.8,2787.94 J14.3@2200.8,2663.38 2200.8,2584.33 2194,2577.53 2194,2153.37 2395,1952.37 v1(2395,1860)
  Bottom Layer w8: U8.5@834.25,1700 900,1700 1003,1803 1003,1982 964,2021 964,2073.2 1004.19,2113.39 U5.3@1112.8,2113.39 1229.65,2113.39 1239.26,2123 1273,2123 v1(1315,2165) ; v1(2395,1860) 2508.48,1973.48 2576.82,1973.48 2580.5,1977.17 U2.54@2628.23,1977.17
SPI2_SO: J14.7 U2.53 U5.4 U8.2 | length 3391.6
  Top Layer w8: v1(1255,2085) 1293,2047 1330.74,2047 1353,2069.26 1353,2098 1370,2115 1370,2509.75 1645.25,2785 1980,2785 2027.57,2737.43 J14.7@2027.57,2663.38 2027.57,2570.11 2054.67,2543 2114.37,2543 2161,2496.37 2161,2141.12 2305,1997.12 2305,1930 2335,1900 v1(2335,1860)
  Bottom Layer w8: U8.2@1115.75,1800 1055,1800 1021,1834 1021,1989.46 982,2028.46 982,2065.74 1004.26,2088 1045.74,2088 1045.94,2087.8 U5.4@1112.8,2087.8 1252.2,2087.8 v1(1255,2085) ; v1(2335,1860) 2404,1929 2441.37,1929 2501.85,1989.48 2570.19,1989.48 2577.56,1996.85 U2.53@2628.23,1996.85
SST_CS: U2.51 U8.1 | length 1948.2
  Top Layer w8: v1(1255,1850) 1495,2090 1922.28,2090 1988,2024.28 1988,2009.63 2046,1951.63 2046,1861.67 2124.67,1783 2168,1783 2205,1820 v1(2230,1820)
  Bottom Layer w8: U8.1@1115.75,1850 v1(1255,1850) ; v1(2230,1820) 2270,1860 2270,1933.33 2360.15,2023.48 2556.11,2023.48 2568.41,2035.78 2627.79,2035.78 U2.51@2628.23,2036.22
SWCLK: J1.2 U2.76 | length 3405.2
  Top Layer w8: v1(220,2825) 222,2823 316.04,2823 453,2686.04 453,2659.67 474.67,2638 504.37,2638 783,2359.37 783,2018.92 1171.92,1630 1609.5,1630 1630.08,1650.58 1739.92,1650.58 1760.5,1630 2165,1630 2195,1660 2262.67,1660 2299.67,1697 2338,1697 v1(2375,1660)
  Bottom Layer w8: J1.2@100,2825 v1(220,2825) ; v1(2375,1660) 2412,1697 2495.33,1697 2565.78,1626.55 2565.78,1502.21 U2.76@2566.22,1501.77
SWDIO: J1.4 U2.72 | length 3499.9
  Top Layer w8: J1.4@100,3025 163,2962 163,2829.67 207.67,2785 330,2785 437,2678 437,2653.05 468.05,2622 497.75,2622 767,2352.75 767,2012.29 1165.29,1614 1616.13,1614 1636.71,1634.58 1733.29,1634.58 1753.87,1614 2171.63,1614 2201.63,1644 2275,1644 2291,1660 v1(2315,1660)
  Bottom Layer w8: v1(2315,1660) 2368,1713 2501.95,1713 2581.78,1633.17 2581.78,1632.75 2591.69,1622.83 U2.72@2628.23,1622.83
SWO: J1.6 U2.89 | length 3639.7
  Top Layer w8: J1.6@100,3225 195,3130 195,2930 270,2855 329.3,2855 473.49,2710.81 474.67,2712 505.33,2712 527,2690.33 527,2660.63 815,2372.63 815,2035 1070,1780 1245,1780 1535,2070 1919.65,2070 1972,2017.65 1972,2003 2030,1945 2030,1855.05 2118.05,1767 2178,1767 v1(2245,1700)
  Bottom Layer w8: v1(2245,1700) 2250,1700 2275,1675 2275,1647.33 2310.32,1612.01 U2.89@2310.32,1501.77
UART1_RX: U2.93 U7.5 | length 2328.1
  Top Layer w8: U7.5@500,2010 570,2080 570,2120 605,2155 675,2155 718,2112 718,1993.41 1284.41,1427 1611.13,1427 1636.71,1401.42 2251.42,1401.42 v1(2255,1405)
  Bottom Layer w8: U2.93@2231.57,1501.77 2231.57,1428.43 v1(2255,1405)
UART1_TX: U2.92 U7.6 | length 2349.4
  Top Layer w8: U7.6@500,1910 575,1985 575,2015 620,2060 675,2060 702,2033 702,1986.78 1277.78,1411 1604.5,1411 1630.08,1385.42 2214.58,1385.42 v1(2255,1345)
  Bottom Layer w8: U2.92@2251.26,1501.77 2251.26,1461.07 2295,1417.33 2295,1385 v1(2255,1345)
UART2_RX: U2.87 U14.4 | length 1045.6
  Top Layer w8: v1(2370,1395) 2375,1395 2414,1356 2546.63,1356 2576.63,1326 2639,1326 2677,1288 2677,1173 v1(2680,1170)
  Bottom Layer w8: U2.87@2349.69,1501.77 2349.69,1420.31 2370,1400 v1(2370,1395) ; U14.4@2475,795.04 2475,965 v1(2680,1170)
UART2_TX: U2.86 U14.1 | length 1172.7
  Top Layer w8: v1(2430,1395) 2423.74,1395 2386.74,1432 2353.26,1432 2333,1411.74 2333,1378.26 2371.26,1340 2540,1340 2575,1305 v1(2575,1170)
  Bottom Layer w8: U14.1@2325,795.04 2325,830 2439,944 2439,979.91 2575,1115.91 v1(2575,1170) ; U2.86@2369.37,1501.77 2369.37,1454.37 2428.74,1395 v1(2430,1395)
UART3_RX: R23.1 U2.48 | length 406.2
  Bottom Layer w8: U2.48@2526.85,2098.23 2526.85,2144.27 2529,2146.42 2529,2203.58 2528.79,2203.79 2597.44,2272.44 R23.1@2800,2272.44
UART3_TX: R25.2 U2.47 | length 495.9
  Bottom Layer w8: U2.47@2507.17,2098.23 2507.17,2147.21 2513,2153.05 2513,2196.95 2507.17,2202.79 2507.17,2392.17 2550,2435 R25.2@2550,2571.56
UART4_RX: U2.79 U4.1 | length 1950.1
  Top Layer w8: v1(2480,1660) 3405,1660 v1(3485,1580)
  Bottom Layer w8: v1(2480,1660) 2480,1587.67 2507.17,1560.51 U2.79@2507.17,1501.77 ; v1(3485,1580) 3585,1480 4070,1480 4118.1,1431.9 U4.1@4118.1,1383.85
UART4_TX: U2.78 U4.2 | length 1821.4
  Top Layer w8: v1(2520,1610) 2530,1610 2564,1644 3398.37,1644 3448,1594.37 3448,1564.67 3485,1527.67 v1(3485,1520)
  Bottom Layer w8: v1(2520,1610) 2526.85,1603.15 U2.78@2526.85,1501.77 ; v1(3485,1520) 3541,1464 4026,1464 4059.05,1430.95 U4.2@4059.05,1383.85
UART5_RX: U2.83 U15.12 | length 1455.7
  Top Layer w8: v1(2530,1395) 2530.25,1395 2583.25,1342 2733,1342 2775,1300 v1(2775,1170)
  Bottom Layer w8: U2.83@2428.43,1501.77 2428.43,1461.57 2439,1451 2474,1451 v1(2530,1395) ; v1(2775,1170) 2805,1170 2857,1118 2857,1117.54 3085,889.54 3085,745 3050,710 2915,710 2875,670 U15.12@2875,610
UART5_TX: U2.80 U15.11 | length 1413.8
  Top Layer w8: v1(2590,1395) 2627,1358 2812,1358 2875,1295 v1(2875,1170)
  Bottom Layer w8: U2.80@2487.48,1501.77 2487.48,1462.98 2510.46,1440 2540.96,1440 2585.96,1395 v1(2590,1395) ; v1(2875,1170) 2875,1125 3103,897 3103,737.54 3057.46,692 2947,692 2925,670 U15.11@2925,610
UART6_RX: U2.64 U12.17 U13.5 | length 1444.8
  Top Layer w8: U12.17@3075,2350 3282.37,2350 3425,2492.63 U13.5@3425,2650
  Bottom Layer w8: U2.64@2628.23,1780.32 2716.85,1780.32 2728.16,1769 2811.84,1769 2939,1896.16 2939,2003.49 3025,2089.49 3025,2300 U12.17@3075,2350
UART6_TX: R20.2 U2.63 U12.16 U13.4 | length 1552.9
  Top Layer w8: U12.16@2974.61,2250 3024.61,2300 3255,2300 3525,2570 U13.4@3525,2650
  Bottom Layer w8: U2.63@2628.23,1800 2719.79,1800 2734.79,1785 2805.21,1785 2923,1902.79 2923,2198.39 U12.16@2974.61,2250 ; R20.2@3525,2578.44 U13.4@3525,2650
VCC3V3: B1.1 B2.1 C1.2 C2.2 C3.2 C4.2 C5.2 C6.2 C7.2 C16.1 C17.1 C19.2 D1.1 J1.1 P1.2 R1.2 R2.2 U2.11 U2.19 U2.28 U2.50 U2.75 U2.100 U3.5 | length 7225.2
  Top Layer w8: P1.2@1697.6,1801.26 1697.6,1857.4 R1.2@1695,1860 1730,1895 1770,1895 1823.12,1948.12 C1.2@1830,1948.12 C6.2@1880,1948.12 1926.88,1948.12 1960,1915 v2(1965,1915) ; v1(1980,2175) v1(2055,2100) ; v1(2630,1520) v1(2975,1520) ; v1(2770,1870) 2910,1730 v1(2960,1730)
  Bottom Layer w8: J1.1@100,2725 1440,2725 1540,2625 1540,2555 1440,2455 1440,1864.73 D1.1@1275.27,1700 ; 1540,2560 1705,2395 1791,2395 C7.2@1866,2320 1866,2304.07 C17.1@1925.07,2245 ; B2.1@1831.26,2080 B1.1@1831.26,2150 1831.26,2151.19 C17.1@1925.07,2245 ; v2(1965,1915) 1968.11,1918.11 U2.19@2031.77,1918.11 2078.11,1918.11 2095,1935 2200,1935 2225,1960 ; v1(1980,2175) 1980,2190.07 C17.1@1925.07,2245 ; U2.11@2031.77,1760.63 2079.37,1760.63 2094.22,1745.78 2094.22,1670 ; v1(2055,2100) 2055,2075 2080,2050 2132.53,2050 2197.53,1985 2225,1985 ; R2.2@2065,1375 C2.2@2065,1430 2093.78,1458.78 U2.100@2093.78,1501.77 2094.22,1502.21 2094.22,1670 ; C5.2@2120,2200 2133.15,2186.85 U2.28@2133.15,2098.23 2133.15,2050 ; U2.75@2628.23,1563.78 2675,1563.78 2690,1548.78 C3.2@2690,1515 2685,1520 v1(2630,1520) ; v1(2770,1870) 2770,2005 2715,2060 2674,2060 C4.2@2634,2100 2567.99,2100 U2.50@2566.22,2098.23 2566.22,2056.22 2549.48,2039.48 2299.48,2039.48 2245,1985 2225,1985 ; v1(2960,1730) 3007.24,1682.76 U3.5@3052.6,1682.76 3052.6,1612.6 C16.1@3030,1590 3020,1580 C19.2@3020,1520 v1(2975,1520) ; 2094.22,1670 2097.22,1673 2153,1673 2175,1695 2175,1775 2185,1785 2185,1845 2225,1885 2225,1960 ; 2225,1960 2225,1985
VIN: D6.1 J15.1 J16.1 | length 744.4
  Top Layer w10: J15.1@4100,400 4100,390 4135.43,390 D6.1@4300,225.43
  Bottom Layer w10: J16.1@3700,400 3780,480 4020,480 J15.1@4100,400
VOLT: C31.2 D5.2 R7.1 R8.2 U2.24 | length 2783.5
  Top Layer w10: v2(2105,2016.54) 2167.2,2016.54 2293,1890.74 2293,1752 2305,1740 2346.26,1740 2368.26,1718 2402.46,1718 2438,1682.46 2438,1647 2475,1610 2475,1566.72 2572.72,1469 2956,1469 3183,1242 3183,1148 v1(3180,1145)
  Bottom Layer w10: U2.24@2031.77,2016.54 v2(2105,2016.54) ; v1(3180,1145) 3183,1142 3183,1124.67 3362.67,945 3821,945 R8.2@3881,1005 R7.1@3925,1005 3925,1030.27 D5.2@3974.73,1080 3899.73,1155 C31.2@3878.44,1155
VPOW: C33.1 C36.1 R7.2 U9.3 U9.4 U10.7 | length 1147.3
  Top Layer w10: U10.7@3677.36,775 3735,775 3760,800 3760,960 3950.99,1150.99 C36.1@4071.63,1150.99 4077.56,1145.06 4077.56,1005 ; v1(4030,1005) 4077.56,1005 ; U9.3@4146.46,775 U9.4@4146.46,825 4146.46,831.1 C33.1@4077.56,900 4077.56,1005
  Bottom Layer w10: R7.2@3981,1005 v1(4030,1005)
VRELAY: C37.1 C38.2 D7.2 D9.2 D10.2 D11.2 D12.2 LS1.1 LS2.1 LS3.1 LS4.1 P2.6 | length 5684.3
  Top Layer w30: LS1.1@300,1300 405,1195 645,1195 LS2.1@750,1300 850,1200 1100,1200 LS3.1@1200,1300 1305,1195 1560,1195 LS4.1@1657.5,1292.5 ; LS4.1@1650,1300 LS4.1@1657.5,1292.5 ; D7.2@2325,690.43 2325,735 2260,800 2205,800 2150,855 C37.1@2150,981.77 ; C38.2@2325,946.56 2185.21,946.56 C37.1@2150,981.77 ; LS4.1@1657.5,1292.5 1968.23,981.77 C37.1@2150,981.77
  Bottom Layer w30: LS1.1@300,1300 300,1175.27 D9.2@300.27,1175 420.27,1055 2330,1055 P2.6@2525,1250 ; LS2.1@750,1300 750.27,1299.73 D10.2@750.27,1175 ; LS3.1@1200,1300 1200.27,1299.73 D11.2@1200.27,1175 ; LS4.1@1650,1300 1650.27,1299.73 D12.2@1650.27,1175
WIFI_EN: Q8.1 R26.2 U2.45 | length 429.9
  Top Layer w8: v1(2460,2175) 2460,2149.5 2450,2139.5 2600,1989.5 R26.2@2600,1986 2605.34,1986 Q8.1@2662.6,1928.74
  Bottom Layer w8: v1(2460,2175) 2460,2165 2450,2155 2467.8,2137.2 U2.45@2467.8,2098.23
WIFI_RST: U2.46 U16.6 | length 909.4
  Bottom Layer w8: U2.46@2487.48,2098.23 2487.48,2150.15 2497,2159.67 2497,2190.33 2487.48,2199.85 2487.48,2642.01 2517.47,2672 2658,2672 2672,2658 2672,2578 U16.6@2725,2525
ZIG_RST: U2.65 U12.13 | length 696.7
  Bottom Layer w8: U2.65@2628.23,1760.63 2713.91,1760.63 2721.54,1753 2818.46,1753 2955,1889.54 2955,1990 3075,2110 U12.13@3075,2150
pads on no net: H1.1 H2.1 H3.1 H4.1 J14.1 J14.8 J14.14 J14.15 U1. U3.4 U4.3 U4.4 U4.5 U4.6 U4.7 U4.8 U4.9 U4.10 U4.15 U4.16 U4.17 U4.18 U4.19 U4.20 U4.23 U4.25 U4.26 U4.27 U4.28 U4.29 U4.30 U4.31 U4.32 U4.33 U4.34 U5.10 U5.11 U5.15 U5.16 U6.7 U6.8 U7.9 U7.10 U10.2 U10.3 U10.5 U12.1 U12.2 U12.3 U12.4 U12.5 U12.6 U12.7 U12.8 U12.10 U12.11 U12.12 U12.14 U12.15 U12.18 U12.19 U12.20 U12.21 U13.6 U15.7 U15.8 U15.9 U15.10 U16.3 U16.5

## Keep-outs
Keep-Out Layer:
  the board outline again, w10

## Silkscreen, mask and mechanical layers (free items; w line width, h text height)
Top Overlay:
  text "GSM" at 50,2300 h60
  text "GPS" at 50,1850 h60
  text "GND" at 3225,110 h60
Bottom Overlay:
  text "Demeter 02/2016" at 1000,50 h60
Mechanical 2:
  circle w0.5: c-531.88,92.27 r78.74
  circle w0.5: c4940.56,69.61 r78.74
  circle w0.5: c4940.56,3359.99 r78.74
  circle w0.5: c-531.88,3359.99 r78.74
  circle w0.5: c3976,151.33 r118.11
  circle w0.5: c3976,151.33 r49.21
  circle w0.5: c2794.89,151.33 r118.11
  circle w0.5: c2794.89,151.33 r49.21
  circle w0.5: c1613.79,151.33 r118.11
  circle w0.5: c1613.79,151.33 r49.21
  circle w0.5: c432.69,3261.57 r118.11
  circle w0.5: c432.69,3261.57 r49.21
  circle w0.5: c4251.59,2513.53 r118.11
  circle w0.5: c4251.59,2513.53 r49.21
  circle w0.5: c157.1,2513.53 r118.11
  circle w0.5: c157.1,2513.53 r49.21
  circle w0.5: c157.1,938.73 r118.11
  circle w0.5: c157.1,938.73 r49.21
  circle w0.5: c4251.59,938.73 r118.11
  circle w0.5: c4251.59,938.73 r49.21
  circle w0.5: c432.69,151.33 r118.11
  circle w0.5: c432.69,151.33 r49.21
  circle w0.5: c1613.79,3261.57 r118.11
  circle w0.5: c1613.79,3261.57 r49.21
  circle w0.5: c2794.89,3261.57 r118.11
  circle w0.5: c2794.89,3261.57 r49.21
  circle w0.5: c3976,3261.57 r118.11
  circle w0.5: c3976,3261.57 r49.21
  circle w0.5: c4881.51,1726.13 r78.74
  circle w0.5: c4881.51,1726.13 r177.17
  circle w0.5: c-472.83,1726.13 r78.74
  circle w0.5: c-472.83,1726.13 r177.17
  lines w0.5: -577.1,423.85 ccw(c-531.88,92.27) -531.88,-242.37 4940.56,-242.37 ccw(c4940.56,92.27) 4985.79,423.85 cw(c5038.99,813.94) 4645.29,813.94 4645.29,1312.75 cw(c4842.14,1312.75) 4842.14,1509.6 4881.51,1509.6 ccw(c4881.51,1726.13) 4881.51,1942.67 4842.14,1942.67 cw(c4842.14,2139.52) 4645.29,2139.52 4645.29,2638.32 cw(c5038.99,2638.32) 4985.79,3028.41 ccw(c4940.56,3359.99) 4940.56,3694.64 -531.88,3694.64 ccw(c-531.88,3359.99) -577.1,3028.41 cw(c-630.31,2638.32) -236.6,2638.32 -236.6,2139.52 cw(c-433.45,2139.52) -433.45,1942.67 -472.83,1942.67 ccw(c-472.83,1726.13) -472.83,1509.6 -433.45,1509.6 cw(c-433.45,1312.75) -236.6,1312.75 -236.6,813.94 cw(c-630.31,813.94) -577.1,423.85 ; -189.36,1.72 ccw(c7.49,1.72) 7.49,-195.13 4401.19,-195.13 ccw(c4401.19,1.72) 4598.04,1.72 4598.04,3450.54 ccw(c4401.19,3450.54) 4401.19,3647.39 7.49,3647.39 ccw(c7.49,3450.54) -189.36,3450.54 -189.36,1.72 ; -138.39,1.72 ccw(c7.49,1.72) 7.49,-144.16 4401.19,-144.16 ccw(c4401.19,1.72) 4547.08,1.72 4547.08,3450.54 ccw(c4401.19,3450.54) 4401.19,3596.42 7.49,3596.42 ccw(c7.49,3450.54) -138.39,3450.54 -138.39,1.72

## Text inside footprints (layer, text, board x,y; h text height)
U12: Top Overlay "J1" at 3783.66,2170.67 h60 r270; Top Overlay "J2" at 3215.75,2203.15 h60 r270; Top Overlay "ZigBee Module" at 3629.13,2646.06 h60 r270
U13: Top Overlay "1" at 3925,2700 h56.25 r180
U16: Top Overlay "1" at 2650,2170 h56.25 r90